# Altium PCB PCB.PcbDoc (part 2 of 2)
Units mm, origin at the board's own origin, x right, y up, seen from the top; angles counter-clockwise.
Board outline 96.72 x 126.91 mm, 2 copper layers (Top Layer, Bottom Layer), stack 1.571 mm thick; 115 components, 74 nets, 368 pads, 160 vias.
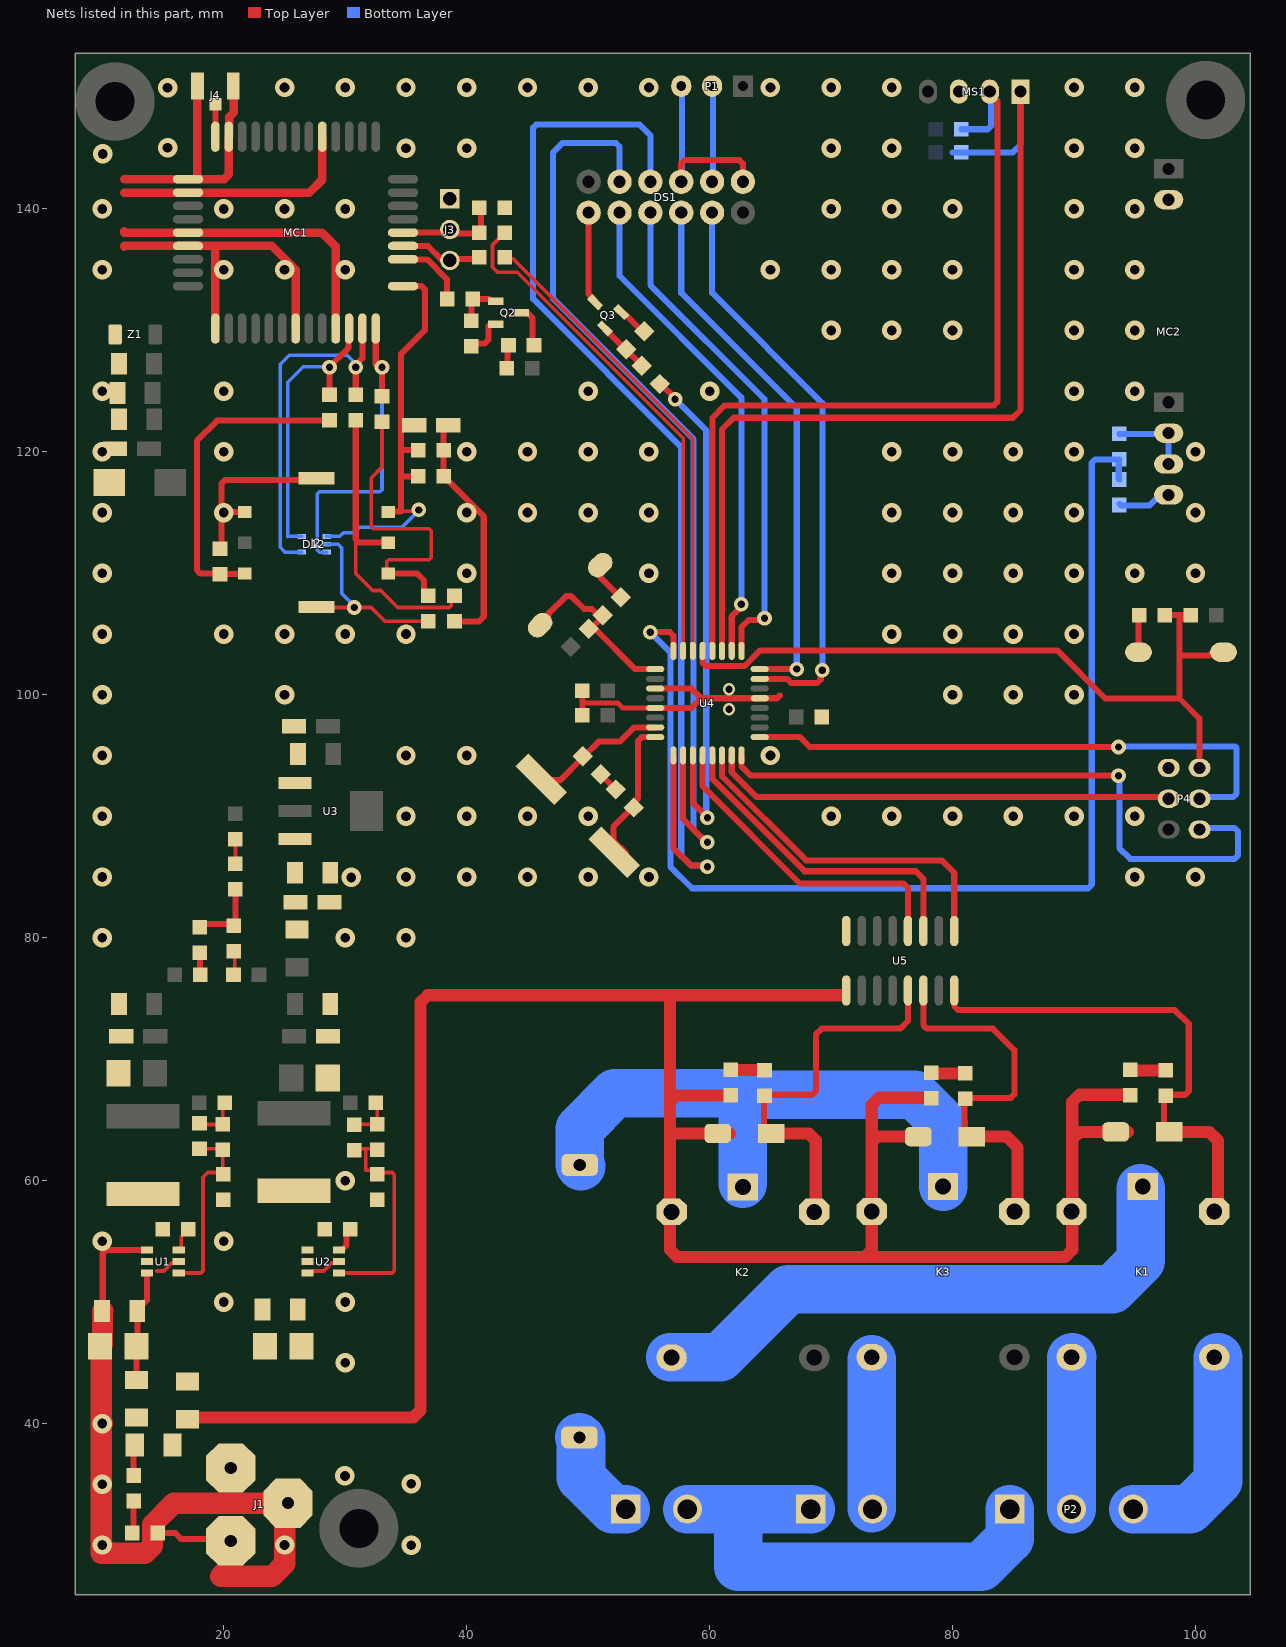
[diagram p2: the nets of this part, all layers, seen from the top]

## Via types
v1: diameter 1.6, hole 0.8, Top Layer to Bottom Layer, tented both sides, 136 vias
v2: diameter 1.2, hole 0.6, Top Layer to Bottom Layer, 22 vias
v3: diameter 1, hole 0.6, Top Layer to Bottom Layer, 2 vias

## Nets (pads, with @x,y where several pads share a name; then routed paths per layer and width w, separated by ;. In a path a pad name is that pad's centre, name@x,y a point inside that pad or via, vN(x,y) a via of type N, cw(c..) or ccw(c..) an arc to the next point about the centre after c; other vN are vias at no path point) (continued)
+12: D1.1 D5.1 D6.1 D7.1 D8.2 D9.2 D10.2 F1.2 F2.1 F3.1 K1.5 K2.5 K3.5 U5.9 | length 199.1
  Top Layer w0.5: D1.1@12.573,35.671 F1.2@12.573,37.976
  Top Layer w1: F3.1@17.018,40.51 35.609,40.51 36.195,41.096 36.195,74.681 36.781,75.267 56.738,75.267 ; D9.2@61.665,63.881 D9.2@60.665,63.881 57.023,63.881 56.738,63.596 ; D6.1@61.722,67.022 57.243,67.022 56.738,66.517 ; U5.9@71.007,75.267 56.738,75.267 ; D10.2@77.175,63.627 73.787,63.627 73.344,63.184 ; D7.1@78.232,66.818 73.93,66.818 73.344,66.232 73.344,63.627 73.344,63.184 ; D8.2@94.431,64.008 D8.2@93.431,64.008 90.44,64.008 89.854,63.422 ; D5.1@94.615,67.072 90.44,67.072 89.854,66.486 89.854,63.422 ; 56.738,63.596 56.738,66.517 ; 56.738,63.596 56.738,57.658 56.738,54.307 57.324,53.721 72.758,53.721 ; 56.738,66.517 56.738,75.267 ; 72.758,53.721 73.344,54.307 73.344,57.462 K3.5@73.34,57.466 73.344,57.47 73.344,63.184 ; 72.758,53.721 89.268,53.721 89.854,54.307 89.854,57.666 89.854,63.422
GND: C1.2 C3.2 C4.2 C5.2 C7.2 C9.2 C10.2 C11.2 C12.2 C14.2 C15.2 C16.2 C17.2 C18.2 C19.2 C20.2 C21.2 C22.2 C23.2 C24.2 C25.2 C26.2 C27.2 C28.2 C29.2 C30.2 C31.2 C32.2 C33.2 C34.2 C35.2 C40.2 D12.2 DS1.1 DS1.5 J1.2 J1.3 J2.5 J3.1 J4.2 J4.3 MC1.1 MC1.7 MC1.10 MC1.27 MC1.34 MC1.36 MC1.37 MC1.40 MC1.41 MC2.2 MC2.6 MS1.3 P1.3 P4.6 Q2.2 Q3.2 R2.2 R5.2 R7.1 R8.1 R9.1 R10.1 R18.1 R24.1 R26.1 R36.1 S1.1 S2.1 U1.1 U2.1 U3.1 U4.3 U4.5 U4.21 U5.8 Z1.1 | length 278.4
  Top Layer w0.3: J2.5@27.652,107.188 v2(30.734,107.188) 32.131,107.188 33.274,106.045 C24.2@36.814,106.045
  Top Layer w0.4: 49.546,99.314 52.451,99.314 52.851,98.914 U4.5@55.516,98.914
  Top Layer w0.5: C1.2@10.03,49.276 10.03,53.997 10.323,54.29 U1.1@13.686,54.29 ; R7.1@14.589,30.988 16.002,30.988 16.51,30.48 20.438,30.48 J1.2@20.574,30.344 ; R9.1@18.034,81.137 20.955,81.137 R10.1@20.955,84.193 ; C23.2@19.812,111.998 v1@19.812,114.769 ; J2.5@21.659,114.935 21.532,115.062 20.105,115.062 v1@19.812,114.769 ; J2.5@27.559,117.695 20.105,117.695 19.812,117.402 v1@19.812,114.769 ; C28.2@38.084,122.174 C26.2@38.084,120.142 ; C26.2@38.109,120.142 C26.2@38.084,120.142 ; C25.2@38.989,106.036 41.012,106.036 41.402,106.426 41.402,114.69 C27.2@38.109,117.983 38.084,117.983 C26.2@38.084,120.142 ; R18.1@40.386,128.921 41.491,128.921 41.784,129.214 41.784,130.345 41.884,130.445 Q2.2@42.134,130.445 ; C19.2@49.546,98.298 49.546,99.314 C21.2@49.546,100.33 ; C35.2@51.009,93.464 C34.2@52.289,92.184 ; S2.1@51.063,110.595 51.062,110.594 51.062,109.576 C40.2@52.708,107.93 ; Q3.2@52.934,131.36 52.998,131.36 54.365,129.993 R26.1@54.428,129.993 ; U4.3@55.417,100.514 58.49,100.514 59.29,99.714 ; U4.5@55.516,98.914 58.49,98.914 59.29,99.714 ; DS1.5@57.658,142.24 57.658,143.725 57.951,144.018 62.445,144.018 62.738,143.725 DS1.1@62.738,142.24 ; 65.786,99.949 65.551,99.714 U4.21@64.118,99.714 59.29,99.714 ; S1.1@95.306,103.505 C22.2@95.306,106.556
  Top Layer w0.7: 11.811,136.906 11.811,136.949 MC1.41@17.058,136.949 19.431,136.949 ; 11.811,138.176 11.811,138.049 MC1.40@17.058,138.049 28.067,138.049 29.208,136.908 MC1.10@29.208,130.149 ; 11.811,141.351 11.811,141.349 MC1.37@17.058,141.349 27.049,141.349 28.108,142.408 MC1.27@28.108,145.949 ; 11.811,142.449 MC1.36@17.058,142.449 MC1.36@17.736,142.449 ; J4.2@17.828,150.241 17.828,142.541 MC1.36@17.736,142.449 ; MC1.1@19.308,130.149 19.308,136.826 19.431,136.949 ; J4.3@20.828,150.241 20.828,147.955 20.446,147.573 20.446,145.987 MC1.34@20.408,145.949 20.408,142.836 20.021,142.449 MC1.36@17.736,142.449 ; MC1.7@25.908,130.149 25.908,135.001 23.96,136.949 19.431,136.949
  Top Layer w1: C1.2@9.98,49.276 C1.2@10.005,49.251 ; R7.1@14.551,30.988 R7.1@14.589,30.988
  Top Layer w1.75: v1(10,30) v1@10,29.313 ; v1(10,40) v1@9.901,40 ; C1.2@10.03,49.276 10.005,49.251 10.005,46.53 9.817,46.341 C5.2@9.803,46.355 9.901,46.257 v1@9.901,40 ; J1.2@20.574,30.344 20.766,30.152 20.766,28.457 19.741,27.432 23.995,27.432 25.02,28.457 v1@25.02,30 ; v1(25,30) v1@25.02,30 ; v1@9.901,40 9.901,35 9.901,30 9.901,29.313 v1@10,29.313 ; v1@10,29.313 13.496,29.313 14.126,29.943 14.126,31.688 15.882,33.444 J1.3@25.274,33.444 25.274,32.419 25.02,32.165 v1@25.02,30
  Bottom Layer w0.3: D12.2@28.457,112.395 29.415,112.395 29.718,112.092 29.718,108.331 30.734,107.315 v2(30.734,107.188)
  Bottom Layer w0.5: DS1.5@57.658,142.24 57.721,142.303 57.721,150.05 P1.3@57.658,150.114 ; R36.1@93.726,115.713 93.869,115.57 96.203,115.57 97.092,116.459 MC2.6@97.79,116.459
  other v1: 35.433,29.972 10,35 35.433,35.052 29.972,35.687 30,45 20,50 30,50 10,55 20,55 30,60 10,80 30,80 35,80 30.48,84.963 10,85 35,85 40,85 45,85 50,85 55,85 95,85 100,85 10,90 35,90 40,90 45,90 50,90 70,90 75,90 80,90 85,90 90,90 95,90 10,95 35,95 40,95 65,95 10,100 25,100 80,100 85,100 90,100 10,105 20,105 25,105 30,105 35,105 75,105 80,105 85,105 90,105 10,110 40,110 55,110 75,110 80,110 85,110 90,110 95,110 100,110 10,115 20,115 40,115 45,115 50,115 55,115 75,115 80,115 85,115 90,115 100,115 10,120 20,120 40,120 45,120 50,120 55,120 75,120 80,120 85,120 90,120 100,120 10,125 20,125 50,125 60,125 90,125 95,125 70,130 75,130 80,130 90,130 95,130 10,135 20,135 25,135 30,135 65,135 70,135 75,135 80,135 90,135 95,135 10,140 20,140 25,140 30,140 70,140 75,140 80,140 90,140 95,140 10.033,144.526 35,145 40,145 70,145 75,145 90,145 95,145 15.367,145.034 15.367,149.987 25,150 30,150 35,150 40,150 45,150 50,150 55,150 65,150 70,150 75,150 90,150 95,150
  other v3: 61.595,98.806 61.595,100.457
LCD_BL: R25.1 U4.11 | length 42.6
  Top Layer w0.5: R25.1@55.897,125.713 55.897,125.649 57.15,124.396 v2(57.15,124.333) ; U4.11@58.617,94.914 58.617,91.114 v2@59.715,90.015
  Bottom Layer w0.5: v2(57.15,124.333) 59.715,121.768 v2@59.715,90.015
  other v2: 59.817,89.883
LCD_D4: DS1.7 U4.9 | length 92.4
  Top Layer w0.5: U4.9@57.017,94.914 57.017,87.382 58.467,85.932 59.737,85.932 v2(59.817,85.852)
  Bottom Layer w0.5: DS1.7@55.118,142.24 55.118,146.05 54.229,146.939 45.72,146.939 45.466,146.685 45.466,132.588 57.658,120.396 57.658,86.741 58.467,85.932 59.737,85.932 v2(59.817,85.852)
LCD_D5: DS1.8 U4.25 | length 41.3
  Top Layer w0.5: U4.25@62.617,103.714 62.617,105.543 63.239,106.165 64.382,106.165 v2(64.516,106.299)
  Bottom Layer w0.5: DS1.8@55.118,139.7 55.118,133.731 64.516,124.333 v2(64.516,106.299)
LCD_D6: DS1.9 U4.10 | length 78.6
  Top Layer w0.5: U4.10@57.817,94.914 57.817,89.757 v2@59.69,87.884
  Bottom Layer w0.5: DS1.9@52.578,142.24 52.578,145.122 52.285,145.415 47.879,145.415 47.117,144.653 47.117,132.588 58.674,121.031 58.674,105.069 58.665,105.06 58.665,88.909 v2@59.69,87.884
  other v2: 59.817,87.867
LCD_D7: DS1.10 U4.26 | length 40.5
  Top Layer w0.5: U4.26@61.817,103.714 61.817,106.459 62.611,107.253 v2(62.611,107.442)
  Bottom Layer w0.5: DS1.10@52.578,139.7 52.578,134.493 62.611,124.46 v2(62.611,107.442)
LCD_EN: DS1.6 U4.24 | length 44.5
  Top Layer w0.5: U4.24@64.217,102.114 v2@67.167,102.114
  Bottom Layer w0.5: DS1.6@57.658,139.7 57.658,133.096 67.168,123.586 v2(67.168,102.114)
LCD_RS: DS1.4 U4.23 | length 47.4
  Top Layer w0.5: U4.23@64.217,101.314 66.372,101.314 66.721,100.965 68.836,100.965 69.145,101.273 69.145,101.884 v2(69.278,102.018)
  Bottom Layer w0.5: DS1.4@60.198,139.7 60.198,133.096 69.278,124.016 v2(69.278,102.018)
Learn: C40.1 R37.1 S2.2 U4.1 | length 15.1
  Top Layer w0.5: S2.2@46.114,105.646 46.114,105.943 46.716,106.546 46.716,106.66 48.185,108.129 48.599,108.129 49.668,107.061 50.291,107.061 50.798,106.555 C40.1@51.183,106.555 ; C40.1@51.223,106.586 C40.1@51.294,106.515 ; C40.1@51.224,106.585 51.224,106.445 50.283,105.505 50.476,105.505 53.867,102.114 U4.1@55.417,102.114
MISO: P4.1 U4.16 | length 53.8
  Top Layer w0.5: U4.16@62.617,94.914 62.617,94.101 63.373,93.345 v2@93.726,93.345
  Bottom Layer w0.5: v2@93.726,93.345 93.726,87.376 94.615,86.487 103.212,86.487 103.505,86.78 103.505,88.738 103.212,89.031 100.461,89.031 P4.1@100.33,88.9
  other v2: 93.659,93.345
MOSI: P4.4 U4.15 | length 38.2
  Top Layer w0.5: U4.15@61.817,94.914 61.817,93.631 63.877,91.571 97.659,91.571 P4.4@97.79,91.44
Motor: U4.12 U5.4 | length 25.5
  Top Layer w0.5: U4.12@59.417,94.914 59.417,92.475 67.437,84.455 75.972,84.455 76.327,84.1 U5.4@76.327,81.413
NetC1_1: C1.1 C5.1 F2.2 U1.3 U1.5 | length 12.8
  Top Layer w0.3: 14.465,52.554 15.048,52.554 15.709,53.215 16.161,53.215 U1.5@16.286,53.34
  Top Layer w0.5: F2.2@12.827,43.587 12.827,46.331 C5.1@12.803,46.355 12.88,46.432 12.88,49.369 C1.1@13.157,49.646 ; U1.3@13.45,52.365 U1.3@13.661,52.365 ; U1.3@13.686,52.39 U1.3@13.661,52.365 ; C1.1@12.88,49.276 C1.1@13.157,49.553 ; C1.1@12.88,49.276 C1.1@13.157,49.553 ; C1.1@12.88,49.276 C1.1@13.157,49.553 ; C1.1@13.157,49.553 C1.1@13.157,49.646 ; C1.1@13.157,49.646 13.686,50.174 13.686,52.365 U1.3@13.661,52.365
NetC2_1: C2.1 U1.6 | length 2.1
  Top Layer w0.3: U1.6@16.286,54.29 16.377,54.29 16.502,54.415 16.502,55.381 17.002,55.881 C2.1@17.002,56.007
NetC2_2: C2.2 L1.1 U1.2
NetC6_1: C6.1 R2.1 R3.2 U1.4 | length 15.5
  Top Layer w0.3: U1.4@16.286,52.39 18.112,52.39 18.288,52.566 18.288,60.276 18.686,60.674 19.939,60.674 19.92,60.693 19.92,62.6 19.901,62.619 R3.2@17.996,62.619
NetC6_2: C6.2 R1.2 R3.1 | length 3.8
  Top Layer w0.3: R3.1@18.034,64.657 17.996,64.619 19.901,64.619 19.923,64.619 R1.2@19.923,66.421
NetC8_1: C8.1 U2.6 | length 2.2
  Top Layer w0.5: U2.6@29.494,54.29 29.719,54.29 30.087,54.658 30.087,55.757 C8.1@30.337,56.007
NetC8_2: C8.2 L2.1 U2.2
NetC11_1: C11.1 C12.1 F3.2 U2.3 U2.5 | length 2.8
  Top Layer w0.3: U2.3@27.1,52.479 27.137,52.515 27.381,52.515 27.42,52.554 28.218,52.554 28.88,53.215 29.369,53.215 U2.5@29.494,53.34
NetC13_1: C13.1 R5.1 R6.2 U2.4 | length 18.7
  Top Layer w0.3: U2.4@29.494,52.39 33.86,52.39 34.036,52.566 34.036,60.498 33.86,60.674 32.639,60.674 32.463,60.85 31.686,60.85 31.686,62.627 ; R6.2@30.734,62.627 31.686,62.627 ; C13.1@32.639,62.627 31.686,62.627
NetC13_2: C13.2 R4.2 R6.1 | length 3.7
  Top Layer w0.3: R6.1@30.734,64.627 32.639,64.627 32.639,66.421 R4.2@32.623,66.421
NetC15_1: C15.1 C17.1 F4.2 U3.3
NetC23_1: C23.1 J2.4 R19.1 | length 26.3
  Top Layer w0.5: J2.4@21.659,109.855 21.588,109.926 19.884,109.926 19.812,109.998 19.796,109.982 18.073,109.982 17.78,110.275 17.78,120.904 19.447,122.571 R19.1@28.702,122.571
NetC24_1: C24.1 J2.3 R20.1 | length 25.8
  Top Layer w0.3: R20.1@33.02,122.487 33.02,118.745 32.131,117.856 32.131,113.841 32.307,113.665 36.908,113.665 37.084,113.489 37.084,111.301 36.908,111.125 33.577,111.125 33.401,110.949 33.401,110.109 J2.3@33.528,109.982
  Top Layer w0.5: J2.3@33.528,109.982 35.916,109.982 36.48,109.418 36.48,108.486 C24.1@36.83,108.136
NetC25_1: C25.1 J2.2 R21.1 | length 25.5
  Top Layer w0.3: 30.861,112.815 30.861,109.982 32.258,108.585 32.911,108.585 34.308,107.188 34.925,107.188 34.927,107.186 38.558,107.186 38.735,107.364 38.735,107.882 C25.1@38.989,108.136
  Top Layer w0.5: R21.1@30.861,122.609 30.861,112.815 31.154,112.522 J2.2@33.528,112.522 J2.2@33.591,112.459
NetD1_2: D1.2 R7.2 | length 2.7
  Top Layer w0.5: R7.2@12.573,30.988 D1.2@12.573,33.671
NetD2_2: D2.2 R8.2 | length 1.8
  Top Layer w0.3: D2.2@20.844,76.962 20.9,77.018 R8.2@20.9,78.745
NetD3_2: D3.2 R9.2 | length 1.8
  Top Layer w0.5: R9.2@18.034,78.745 18.026,78.745 18.026,77.004 D3.2@18.068,76.962
NetD4_2: D4.2 R10.2 | length 2
  Top Layer w0.3: R10.2@20.955,86.093 D4.2@20.955,88.096
NetD5_2: D5.2 R12.2 | length 2.8
  Top Layer w1: D5.2@94.615,69.072 97.309,69.072 R12.2@97.409,69.072
NetD6_2: D6.2 R13.2 | length 2.8
  Top Layer w1: D6.2@61.722,69.072 61.755,69.105 64.499,69.105 R13.2@64.516,69.088
NetD7_2: D7.2 R14.2 | length 2.8
  Top Layer w1: D7.2@78.232,68.818 R14.2@81.026,68.818
NetD8_1: D8.1 K1.4 R12.1 U5.16 | length 42.7
  Top Layer w0.5: U5.16@80.137,75.813 80.156,75.794 80.156,74.334 80.449,74.041 98.298,74.041 99.441,72.898 99.441,67.365 99.148,67.072 97.409,67.072 97.409,64.186 D8.1@97.231,64.008
  Top Layer w1: D8.1@97.231,64.008 101.141,64.008 101.854,63.295 K1.4@101.854,57.666
NetD9_1: D9.1 K2.4 R13.1 U5.13 | length 33
  Top Layer w0.5: D9.1@64.465,63.881 64.465,66.937 64.6,67.072 68.437,67.072 68.738,67.373 68.738,72.04 69.215,72.517 75.692,72.517 76.327,73.152 U5.13@76.327,75.813
  Top Layer w1: D9.1@64.465,63.881 68.152,63.881 68.738,63.295 K2.4@68.738,57.658
NetD10_1: D10.1 K3.4 R14.1 U5.14 | length 32.5
  Top Layer w0.5: U5.14@77.597,75.813 77.597,72.81 77.89,72.517 83.312,72.517 85.09,70.739 85.09,67.111 84.797,66.818 R14.1@81.026,66.818 ; D10.1@80.975,63.627 R14.1@80.975,66.818
  Top Layer w1: D10.1@80.975,63.627 84.455,63.627 85.344,62.738 85.344,57.72 K3.4@85.09,57.466 ; R14.1@80.975,66.818 R14.1@81.026,66.818
NetD11_2: D11.2 R16.2 | length 1.9
  Top Layer w0.5: D11.2@43.339,126.873 R16.2@43.339,128.778
NetDS1_3: DS1.3 P1.2 | length 7.9
  Bottom Layer w0.5: DS1.3@60.198,142.24 60.262,142.303 60.262,150.05 P1.2@60.198,150.114
NetDS1_12: DS1.12 Q3.3 | length 7.4
  Top Layer w0.5: DS1.12@50.038,139.7 50.038,132.983 50.389,132.633 Q3.3@50.389,132.491
NetF1_1: F1.1 J1.1
NetF5_2: F5.2 K2.1 K3.1 | length 48.7
  Bottom Layer w4: F5.2@49.403,61.189 F5.2@49.301,61.29 49.301,64.287 52.197,67.183 62.103,67.183 62.738,66.548 K2.1@62.738,59.758 ; 61.557,67.072 76.872,67.072 79.215,64.729 K3.1@79.215,59.516
NetJ3_2: J3.2 MC1.18 R23.2 R24.2 | length 8.3
  Top Layer w0.5: MC1.18@34.758,138.049 38.165,138.049 38.223,137.991 40.957,137.991 R23.2@40.963,137.986 ; R23.2@41.026,138.049 41.164,138.187 R24.2@41.164,140.081
NetJ3_3: J3.3 MC1.17 R22.2 | length 6.9
  Top Layer w0.5: MC1.17@34.758,136.949 36.787,136.949 37.846,135.89 38.481,135.89 J3.3@38.608,135.763 38.735,135.89 40.894,135.89 R22.2@41.021,136.017
NetJ4_1: J4.1 MC1.35 | length 2.8
  Top Layer w0.5: MC1.35@19.308,145.949 19.318,145.959 19.318,148.731 J4.1@19.328,148.741
NetK1_1: K1.1 K2.3 | length 48
  Bottom Layer w4: K2.3@56.738,45.458 60.877,45.458 66.473,51.054 93.161,51.054 95.504,53.397 K1.1@95.504,59.356
NetK1_2: K1.2 P2.3 | length 18.1
  Bottom Layer w4: P2.3@94.869,32.956 99.511,32.956 101.854,35.299 K1.2@101.854,45.466
NetK1_3: K1.3 P2.2 | length 12.5
  Bottom Layer w4: P2.2@89.789,32.956 89.789,45.401 K1.3@89.854,45.466
NetK3_3: K3.3 P3.2 | length 12.3
  Bottom Layer w4: P3.2@73.34,33.022 K3.3@73.34,45.281
NetMC1_16: MC1.16 R17.1 | length 5.9
  Top Layer w0.5: MC1.16@34.758,135.849 36.744,135.849 38.37,134.223 R17.1@38.37,132.588
NetMC2_4: MC2.4 MC2.5 R35.1 | length 6.7
  Bottom Layer w0.5: R35.1@93.726,121.485 93.771,121.441 93.797,121.467 97.718,121.467 MC2.4@97.79,121.539 MC2.5@97.79,118.999
NetQ2_1: Q2.1 R17.2 R18.2 | length 3.5
  Top Layer w0.5: R18.2@40.386,130.81 40.378,130.818 40.378,132.458 R17.2@40.508,132.588 41.841,132.588 41.984,132.445 Q2.1@42.134,132.445
NetQ2_3: Q2.3 R16.1 | length 3.1
  Top Layer w0.5: Q2.3@44.734,131.445 44.984,131.445 45.418,131.011 45.418,128.857 R16.1@45.339,128.778
NetQ3_1: Q3.1 R25.2 R26.2 | length 4
  Top Layer w0.5: Q3.1@51.584,129.946 54.409,127.12 R25.2@54.409,127.074
Null: P2.1 P3.1 P6.2 | length 40.7
  Bottom Layer w4: P6.2@58.166,32.956 62.484,32.956 ; P3.1@68.326,32.956 62.484,32.956 ; P2.1@84.709,32.956 84.709,30.537 82.366,28.194 62.357,28.194 62.357,32.829 62.484,32.956
Phase: F5.1 P6.1 | length 8.1
  Bottom Layer w4: F5.1@49.276,38.862 49.403,38.735 49.403,35.56 52.007,32.956 P6.1@53.086,32.956
Pump: U4.13 U5.3 | length 26.1
  Top Layer w0.5: U4.13@60.217,94.914 60.217,93.072 67.818,85.471 76.962,85.471 77.597,84.836 U5.3@77.597,81.413
Remote: R35.2 R36.2 U4.32 | length 97.5
  Top Layer w0.5: v2(55.118,105.156) 56.724,105.156 57.017,104.863 U4.32@57.017,103.714
  Bottom Layer w0.5: v2(55.118,105.156) 56.769,103.505 56.769,85.852 58.547,84.074 91.161,84.074 91.454,84.367 91.454,119.092 91.747,119.385 R35.2@93.726,119.385 93.682,119.341 93.682,119.021 93.682,117.768 R36.2@93.726,117.724
Reset: C22.1 P4.5 R11.1 S1.2 U4.29 | length 62.5
  Top Layer w0.5: U4.29@59.417,103.714 59.417,102.655 59.71,102.362 62.865,102.362 64.135,103.632 88.646,103.632 92.583,99.695 98.679,99.695 ; C22.1@97.468,106.553 R11.1@99.622,106.553 99.368,106.299 98.679,106.299 98.679,103.251 ; P4.5@100.33,93.98 100.33,98.044 98.679,99.695 ; S1.2@102.306,103.505 102.096,103.295 101.207,103.295 101.163,103.251 98.679,103.251 ; 98.679,99.695 98.679,103.251
SCK: P4.3 U4.17 | length 46.6
  Top Layer w0.5: U4.17@64.217,96.514 67.443,96.514 68.256,95.701 v2(93.659,95.701)
  Bottom Layer w0.5: v2@93.274,95.701 v2@93.331,95.758 ; v2@93.716,95.758 103.251,95.758 103.378,95.631 103.378,91.864 103.085,91.571 100.461,91.571 P4.3@100.33,91.44
SCL: MS1.2 R33.1 U4.28 | length 74.4
  Top Layer w0.5: U4.28@60.217,103.714 60.217,122.789 61.253,123.825 83.4,123.825 83.693,124.118 83.693,148.864 83.058,149.499 MS1.2@83.058,149.657
  Bottom Layer w0.5: R33.1@80.718,146.558 82.892,146.558 83.185,146.851 83.185,149.53 MS1.2@83.058,149.657
SDA: MS1.1 R34.1 U4.27 | length 79.8
  Top Layer w0.5: U4.27@61.017,103.714 61.017,121.85 61.976,122.809 84.963,122.809 85.598,123.444 MS1.1@85.598,149.657
  Bottom Layer w0.5: 79.994,144.653 84.963,144.653 85.598,145.288 MS1.1@85.598,149.657
SIM_CLK: D12.3 MC1.13 R20.2 | length 26.1
  Top Layer w0.5: v2@32.508,127.197 MC1.13@32.508,130.149 ; R20.2@33.02,124.571 R20.2@33.02,124.587 v2@33.02,126.685
  Bottom Layer w0.3: D12.3@28.457,111.745 27.862,111.745 27.686,111.921 27.686,116.537 27.862,116.713 32.844,116.713 33.02,116.889 v2@33.02,127
  other v2: 33.02,126.955
SIM_DATA: D12.5 MC1.11 R19.2 | length 24
  Top Layer w0.5: R19.2@28.702,124.571 R19.2@28.702,124.714 28.702,127 30.27,128.568 30.27,130.111 MC1.11@30.308,130.149
  Bottom Layer w0.3: D12.5@26.407,113.045 25.288,113.045 25.273,113.03 25.273,125.73 26.543,127 v2@28.702,127
  other v2: 28.702,126.955
SIM_RST: D12.4 MC1.12 R21.2 | length 29.9
  Top Layer w0.5: R21.2@30.861,124.709 30.861,127.144 31.408,127.691 MC1.12@31.408,130.149
  Bottom Layer w0.3: D12.4@26.407,111.745 25.034,111.745 24.638,112.141 24.638,127.205 25.383,127.95 30.165,127.95 31.16,126.955 v2@31.197,126.955
  other v2: 30.861,126.955
SIM_VDD: C26.1 C27.1 C28.1 D12.1 J2.1 MC1.14 | length 36.8
  Top Layer w0.3: 34.578,115.101 35.931,115.101 v2(36.047,115.217)
  Top Layer w0.5: J2.1@33.459,114.935 33.625,115.101 34.578,115.101 34.578,117.983 ; MC1.14@34.758,133.649 36.283,133.649 36.576,133.356 36.576,130.048 34.578,128.05 34.578,122.174 ; C27.1@36.084,117.983 34.578,117.983 ; C26.1@36.084,120.142 34.578,120.142 ; C28.1@36.084,122.174 34.578,122.174 ; 34.578,117.983 34.578,120.142 ; 34.578,120.142 34.578,122.174
  Bottom Layer w0.3: D12.1@28.457,113.045 29.546,113.045 29.846,113.345 30.734,113.345 31.181,113.792 34.671,113.792 36.047,115.168 v2(36.047,115.217)
Speed: U4.14 U5.1 | length 28
  Top Layer w0.5: U4.14@61.017,94.914 61.017,93.288 67.945,86.36 79.121,86.36 80.137,85.344 U5.1@80.137,81.413
uRX: R22.1 U4.30 | length 39.1
  Top Layer w0.3: R22.1@43.121,136.017 43.248,135.89 43.815,135.89 58.617,121.088 U4.30@58.617,103.714
uTX: R23.1 U4.31 | length 42.2
  Top Layer w0.3: R23.1@43.126,138.049 42.114,137.037 42.114,135.201 42.534,134.781 44.162,134.781 57.817,121.126 U4.31@57.817,103.714
Xtal1: C35.1 U4.7 Y1.2 | length 12.7
  Top Layer w0.5: Y1.2@45.175,94.629 46.84,92.964 47.681,92.964 49.595,94.878 50.856,96.139 52.604,96.139 53.779,97.314 U4.7@55.417,97.314
Xtal2: C34.1 U4.8 Y1.1 | length 12.2
  Top Layer w0.5: Y1.1@53.094,86.709 53.094,86.98 52.07,88.004 52.07,89.137 53.703,90.77 53.703,91.089 54.102,91.487 54.102,96.221 54.395,96.514 U4.8@55.417,96.514
pads on no net: J2.6 K2.2 K3.2 MC1.2 MC1.3 MC1.4 MC1.5 MC1.6 MC1.8 MC1.9 MC1.19 MC1.20 MC1.21 MC1.22 MC1.23 MC1.24 MC1.25 MC1.26 MC1.28 MC1.29 MC1.30 MC1.31 MC1.32 MC1.33 MC1.38 MC1.39 MC1.44 MC2.1 MP1.1 MP2.1 MP3.1 P4.2 U4.2 U4.19 U4.22 U5.2 U5.5 U5.6 U5.7 U5.10 U5.11 U5.12 U5.15 Z1.0

## Polygon pours and split planes (outlines as drawn)
GND on Bottom Layer "GND_L02_P000" (solid, remove dead copper, pour order 0): 7.747,25.908 7.747,152.781 104.394,152.781 104.394,82.677 36.068,82.677 36.068,25.908
GND on Top Layer "GND_L01_P001" (solid, remove dead copper, pour order 1): 7.682,25.904 7.682,152.777 104.329,152.777 104.329,82.673 36.003,82.673 36.003,25.904

## Other copper
Top Layer:
  region net GND: 71.615,79.758 71.615,83.441 ccw(c71.234,83.441) 71.234,83.822 69.583,83.822 69.583,82.679 70.61,82.679 cw(c70.61,82.385) 70.904,82.385 70.904,79.961
  region net +5: 22.352,64.516 28.956,64.516 28.956,66.675 27.686,66.675 cw(c27.686,67.31) 27.051,67.31 27.051,78.486 23.114,78.486 ccw(c23.114,77.724) 22.352,77.724 22.352,72.507 ccw(c22.208,71.759) 22.208,72.52 21.339,72.52 ccw(c21.339,71.992) 20.811,71.992 20.811,68.851 ccw(c21.463,68.851) 21.463,68.199 22.352,68.199
  region net +3.3: 24.257,89.916 ccw(c24.892,89.916) 24.892,89.281 33.147,89.281 33.147,91.694 30.48,91.694 30.48,97.155 ccw(c30.44,97.156) 30.48,97.157 cw(c30.732,97.157) 30.732,97.409 47.498,97.409 47.498,101.854 28.702,101.854 ccw(c28.702,100.83) 27.678,100.83 27.678,97.282 27.686,97.282 27.686,91.694 24.765,91.694 ccw(c24.765,91.186) 24.257,91.186
  region net GND: 25.146,91.948 26.67,91.948 ccw(c26.67,92.456) 27.178,92.456 27.178,98.044 25.019,98.044 ccw(c25.019,97.409) 24.384,97.409 24.384,92.71 ccw(c25.146,92.71)
  region net NetC15_1: 27.305,79.629 27.305,88.9 24.511,88.9 ccw(c24.511,88.519) 24.13,88.519 24.13,80.01 ccw(c24.511,80.01) 24.511,79.629
  region net NetC8_2: 26.289,53.594 26.289,53.086 27.94,53.086 ccw(c27.94,53.848) 28.702,53.848 28.702,59.944 22.86,59.944 22.86,57.023 ccw(c24.511,57.023) 24.511,55.372 27.686,55.372 27.686,53.848 cw(c27.432,53.848) 27.432,53.594
  region net GND: 21.844,44.958 24.257,44.958 24.257,53.467 cw(c24.765,53.467) 24.765,53.975 27.432,53.975 27.432,54.737 21.717,54.737 ccw(c21.717,53.848) 20.828,53.848 20.828,45.974 ccw(c21.844,45.974)
  region net NetC11_1: 15.875,42.037 26.162,42.037 ccw(c26.162,43.561) 27.686,43.561 27.686,52.705 25.654,52.705 ccw(c25.654,51.943) 24.892,51.943 24.892,45.085 cw(c24.257,45.085) 24.257,44.45 15.875,44.45 15.875,43.942
  region net +12: 13.843,37.211 11.938,37.211 11.938,41.529 18.161,41.529 18.161,39.497 14.494,39.497 ccw(c14.494,38.846) 13.843,38.846
  region net NetF1_1: 14.859,38.989 14.859,36.322 ccw(c16.383,36.322) 16.383,34.798 23.114,34.798 ccw(c23.114,35.56) 23.876,35.56 23.876,37.465 ccw(c22.352,37.465) 22.352,38.989
  region net +4: 11.049,64.389 16.637,64.389 16.637,129.667 ccw(c15.494,129.667) 15.494,130.81 13.335,130.81 13.335,76.148 13.339,76.148 ccw(c14.097,76.073) 13.335,76.073 13.335,67.183 cw(c12.573,67.183) 12.573,66.421 11.049,66.421
  region net GND: 8.128,42.672 11.176,42.672 11.176,53.34 cw(c11.766,53.34) 11.766,53.93 14.224,53.93 14.224,54.991 10.16,54.991 cw(c10.16,55.753) 9.398,55.753 9.398,66.675 cw(c10.033,66.675) 10.033,67.31 12.443,67.31 12.446,67.307 12.446,142.801 8.689,142.801 ccw(c8.689,142.24) 8.128,142.24 8.128,76.073
  region net NetC2_2: 13.081,52.959 14.478,52.959 ccw(c14.478,53.975) 15.494,53.975 15.494,55.207 15.502,55.207 15.502,59.944 10.668,59.944 10.668,56.769 ccw(c11.938,56.769) 11.938,55.499 14.351,55.499 cw(c14.351,55.118) 14.732,55.118 14.732,53.975 cw(c14.455,53.975) 14.455,53.698 13.081,53.698
  region net GND: 11.176,42.672 8.128,42.672 8.128,27.432 ccw(c9.398,27.432) 9.398,26.162 26.035,26.162 26.035,34.163 20.193,34.163 ccw(c20.193,29.845) 15.875,29.845 cw(c15.113,29.845) 15.113,29.083 11.938,29.083 cw(c11.938,29.845) 11.176,29.845
  region net NetC1_1: 11.684,51.816 11.684,42.799 ccw(c12.446,42.799) 12.446,42.037 13.843,42.037 ccw(c13.843,42.926) 14.732,42.926 14.732,52.705 12.573,52.705 ccw(c12.573,51.816)
  region net GND: 27.508,86.106 27.508,67.195 29.591,67.195 29.591,86.106
Bottom Layer:
  region net +5: 22.208,72.52 20.811,72.52 20.811,68.851 ccw(c21.463,68.851) 21.463,68.199 22.97,68.199 22.97,71.758 ccw(c22.208,71.758)

## Silkscreen, mask and mechanical layers (free items; w line width, h text height)
Top Overlay:
  drawing of 39 lines, arcs and shapes, not listed
  text "aLCD" at 49.476,146.151 h2.5
  text "STS" at 46.555,126.085 h2.5
  text "LEARN" at 44.323,107.09 h2.5 r45
  text "RESET" at 95.45,99.542 h2.5
  text "3.3V" at 20.167,95.812 h2.5 r270
  text "MKII" at 96.72,81.607 h2.5
  text "4V" at 12.011,76.146 h2.5
  text "5V" at 20.647,74.142 h2.5
  text "PUMP" at 60.271,70.741 h2.5
  text "MOTOR" at 76.527,70.713 h2.5
  text "LOW-HIGH" at 90.37,70.713 h2.5
  text "12V" at 13.789,36.249 h2.5 r270
  text "Phase" at 48.079,35.531 h2.5
  text "NULL" at 55.699,35.534 h2.5
  text "NULL" at 64.462,35.534 h2.5
  text "PUMP" at 71.32,35.534 h2.5
  text "NULL" at 80.464,35.534 h2.5
  text "LOW" at 87.322,35.534 h2.5
  text "HIGH" at 93.545,35.534 h2.5
Bottom Overlay:
  drawing of 32 lines, arcs and shapes, not listed
  text "RCS_AVR V1.0" at 35.614,42.427 h2.5
  text "github.com/aKaReZa75" at 35.614,40.04 h2.5
  text "Phase" at 54.791,28.546 h2.5
  text "NULL" at 61.903,28.549 h2.5
  text "NULL" at 67.999,28.549 h2.5
  text "PUMP" at 76,28.549 h2.5
  text "NULL" at 85.906,28.549 h2.5
  text "LOW" at 91.875,28.549 h2.5
  text "HIGH" at 98.479,28.549 h2.5
Board Shape:
  drawing of 1663 lines, arcs and shapes, not listed
Mechanical 13:
  lines w0.5: 58.832,61.714 58.832,56.38 ccw(c60.102,56.38) 60.102,55.11 65.309,55.11 ccw(c65.309,56.38) 66.579,56.38 66.579,61.714 ; 75.438,61.722 75.438,56.388 ccw(c76.708,56.388) 76.708,55.118 81.915,55.118 ccw(c81.915,56.388) 83.185,56.388 83.185,61.722 ; 91.886,55.253 91.886,60.587 cw(c93.156,60.587) 93.156,61.857 98.363,61.857 cw(c98.363,60.587) 99.633,60.587 99.633,55.253

## Text inside footprints (layer, text, board x,y; h text height)
J2: Mechanical 5 "↑" at 38.97,111.989 h4 r90
K1: Top Overlay "NC" at 101.252,48.757 h1.5 r180; Top Overlay "NO" at 92.413,48.935 h1.5 r180; Top Overlay "COM" at 97.645,57.673 h1.5 r180
K2: Top Overlay "NC" at 68.326,48.717 h1.5 r180; Top Overlay "NO" at 59.487,48.895 h1.5 r180; Top Overlay "COM" at 64.719,57.633 h1.5 r180
K3: Top Overlay "NC" at 84.803,48.757 h1.5 r180; Top Overlay "NO" at 75.964,48.935 h1.5 r180; Top Overlay "COM" at 81.196,57.673 h1.5 r180
MC2: Top Overlay "ANT" at 95.29,144.669 h1 r270; Top Overlay "GND" at 95.29,117.769 h1 r270; Top Overlay "D" at 95.39,118.569 h1; Top Overlay "D" at 95.39,120.969 h1; Top Overlay "VCC" at 95.29,125.269 h1 r270
P1: Top Overlay "CW" at 57.582,148.895 h1 r180
P4: Top Overlay "2" at 98.323,85.928 h1 r90; Top Overlay "1" at 100.99,86.208 h1 r90